# EAGLE board ZephyrEye Rev0.2 (EAGLE 4.15)
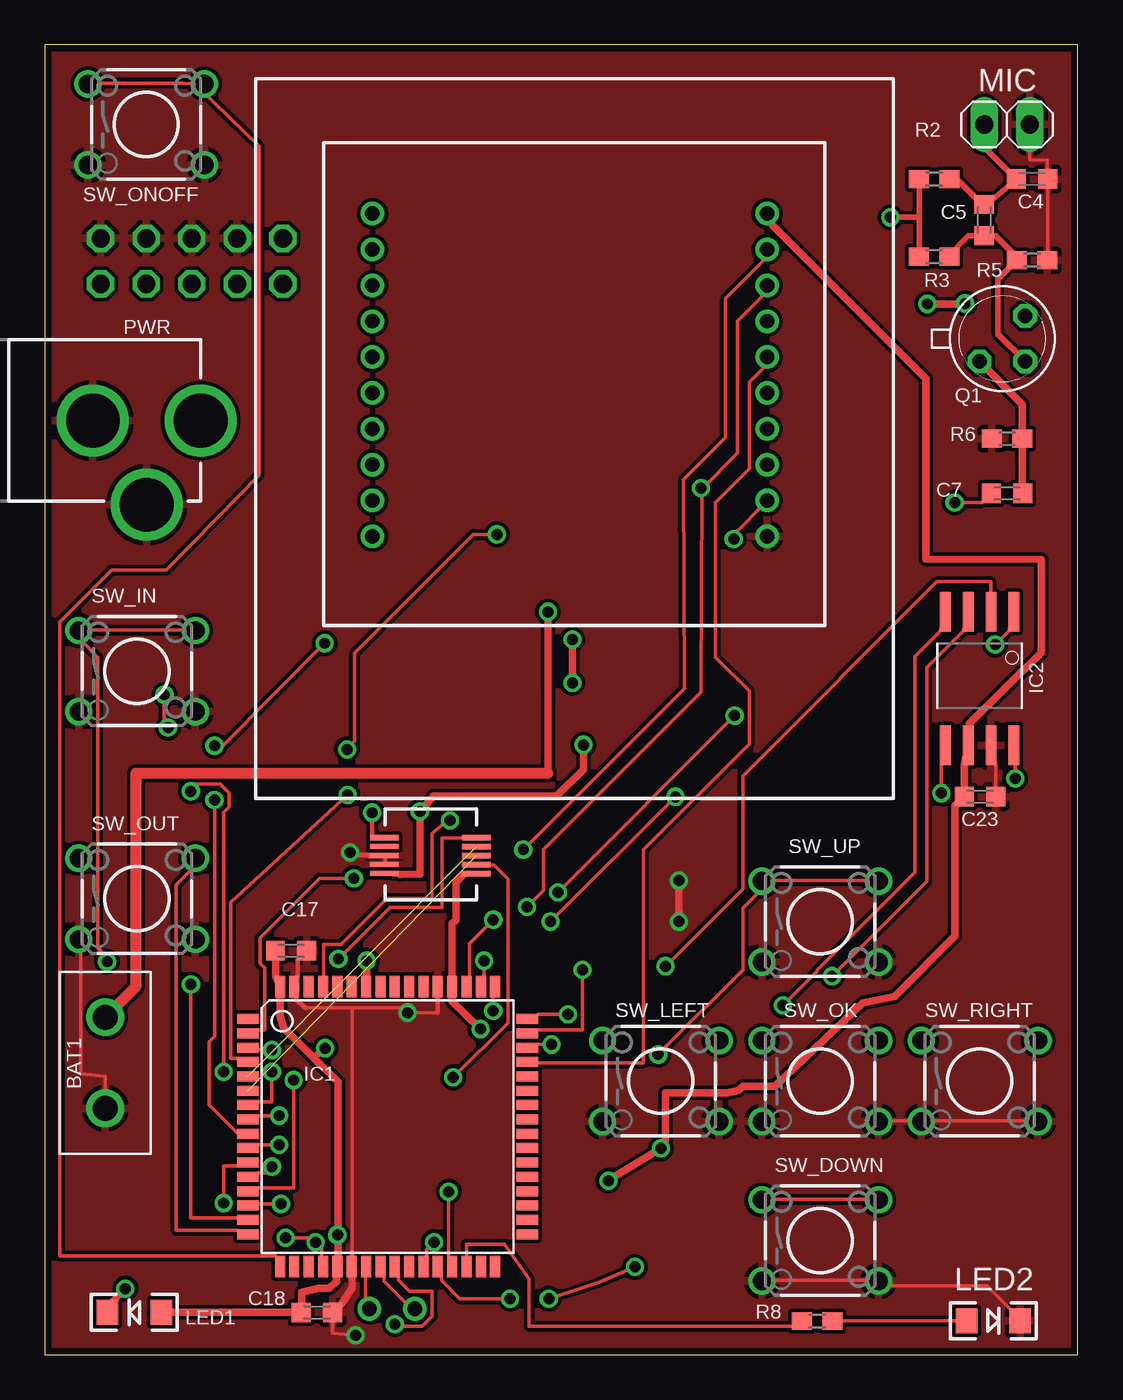
[diagram p0: board, top side]
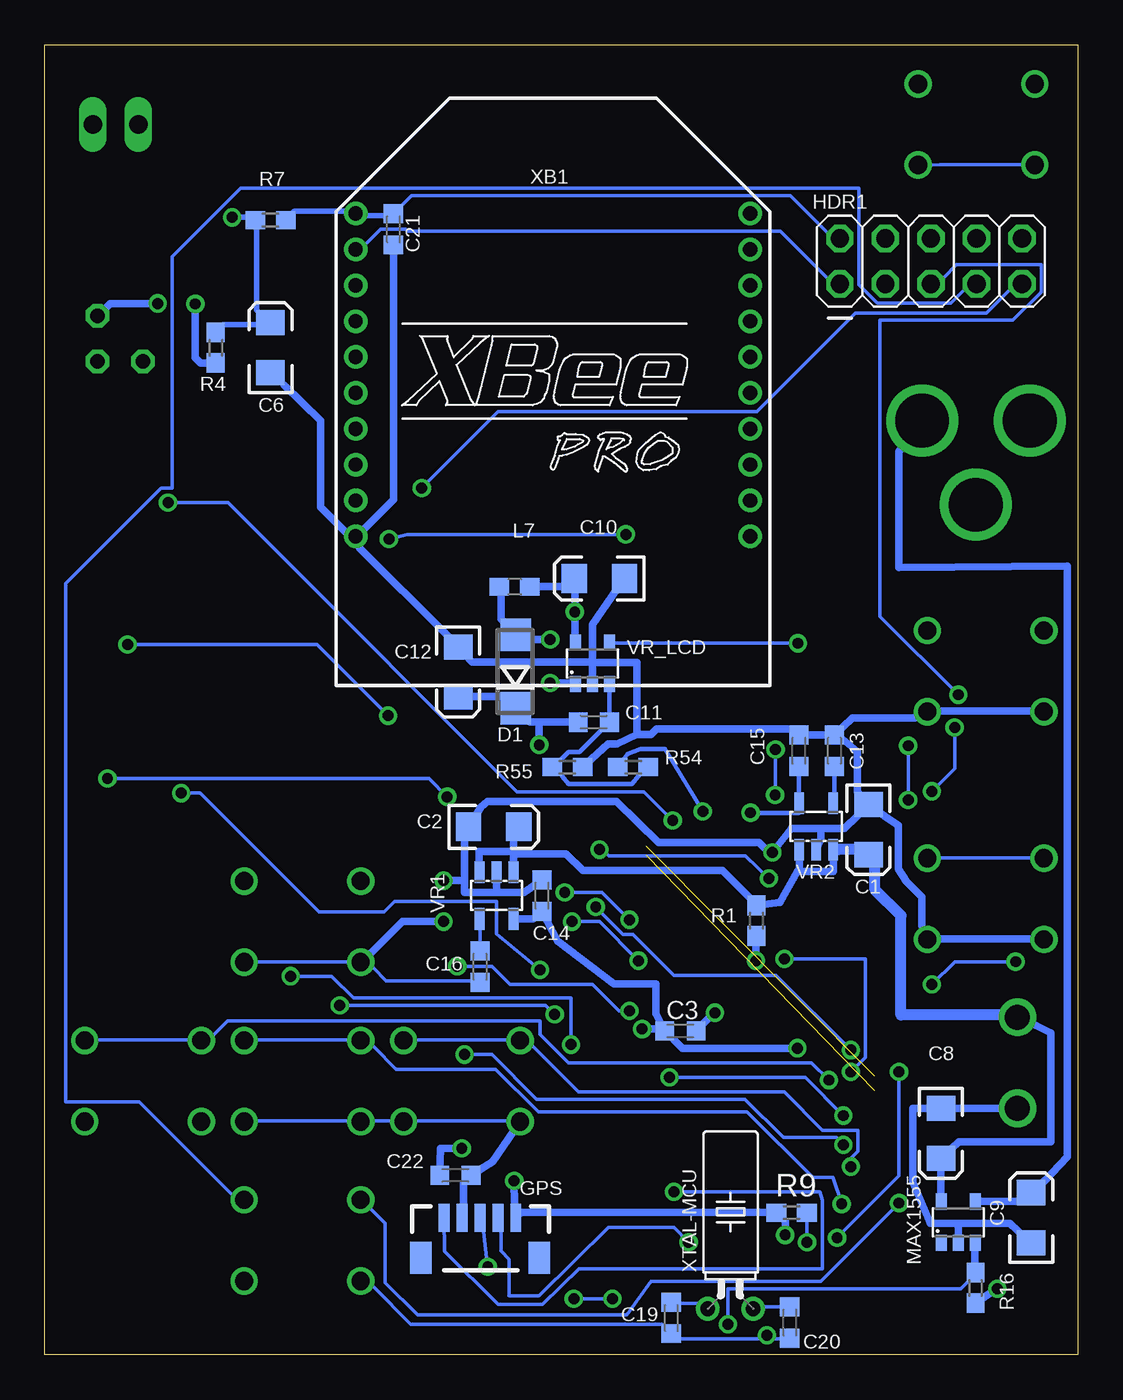
[diagram p1: board, bottom side, seen from below]

Size 57.61 x 73.04 mm. Coordinates in mm from the lower left corner, seen from the top.
Outline: 0,0 57.61,0 57.61,73.04 0,73.04 0,0
Copper layers (1*16): Top 0.035mm / dielectric 1.5mm / Bottom 0.035mm
Design rules "default": minimum track width 8mil, minimum drill 24mil, track to track 8mil, track to pad 8mil, pad to pad 8mil, via to via 8mil, smd to smd 8mil, copper to edge 15mil, drill to drill 8mil, minimum pad ring 10mil, minimum via ring 8mil, stop-mask expansion 4mil, vias tented up to drill 0mil, thermal gap 10mil

## Footprints (pad centres in the part's own frame; a part is rotated, then mirrored left to right if it is on the bottom)
LIPOLY-GEN = drill 1.4 round: V+ -2.54,0; V- 2.54,0
EIA3216 = smd 1.4 x 1.6: A 1.4,0; C -1.4,0
C0603K = smd 1.05 x 1.08: 1 -0.875,0; 2 0.875,0
DO214AC = smd 1.8 x 1.7: A 2.05,0; C -2.05,0
EM408 = smd 0.6 x 1.55: 1 -2,1; 2 -1,1; 3 0,1; 4 1,1; 5 2,1 | smd 1.2 x 1.8: P$1 -3.3,-1.225; P$2 3.3,-1.225
AVR_ICSP = drill 1.016 octagon: 1 -1.27,5.08; 2 1.27,5.08; 3 -1.27,2.54; 4 1.27,2.54; 5 -1.27,0; 6 1.27,0; 7 -1.27,-2.54; 8 1.27,-2.54; 9 -1.27,-5.08; 10 1.27,-5.08
TQFP64 = smd 1.194 x 0.559: 1 -7.8,6; 2 -7.8,5.2; 3 -7.8,4.4; 4 -7.8,3.6; 5 -7.8,2.8; 6 -7.8,2; 7 -7.8,1.2; 8 -7.8,0.4; 9 -7.8,-0.4; 10 -7.8,-1.2; 11 -7.8,-2; 12 -7.8,-2.8; 13 -7.8,-3.6; 14 -7.8,-4.4; 15 -7.8,-5.2; 16 -7.8,-6; 33 7.8,-6; 34 7.8,-5.2; 35 7.8,-4.4; 36 7.8,-3.6; 37 7.8,-2.8; 38 7.8,-2; 39 7.8,-1.2; 40 7.8,-0.4; 41 7.8,0.4; 42 7.8,1.2; 43 7.8,2; 44 7.8,2.8; 45 7.8,3.6; 46 7.8,4.4; 47 7.8,5.2; 48 7.8,6 | smd 0.559 x 1.194: 17 -6,-7.8; 18 -5.2,-7.8; 19 -4.4,-7.8; 20 -3.6,-7.8; 21 -2.8,-7.8; 22 -2,-7.8; 23 -1.2,-7.8; 24 -0.4,-7.8; 25 0.4,-7.8; 26 1.2,-7.8; 27 2,-7.8; 28 2.8,-7.8; 29 3.6,-7.8; 30 4.4,-7.8; 31 5.2,-7.8; 32 6,-7.8; 49 6,7.8; 50 5.2,7.8; 51 4.4,7.8; 52 3.6,7.8; 53 2.8,7.8; 54 2,7.8; 55 1.2,7.8; 56 0.4,7.8; 57 -0.4,7.8; 58 -1.2,7.8; 59 -2,7.8; 60 -2.8,7.8; 61 -3.6,7.8; 62 -4.4,7.8; 63 -5.2,7.8; 64 -6,7.8
SO08WIDE = smd 0.61 x 2.21: 1 -1.905,-3.569; 2 -0.635,-3.569; 3 0.635,-3.569; 4 1.905,-3.569; 5 1.905,3.886; 6 0.635,3.886; 7 -0.635,3.886; 8 -1.905,3.886
0603 = smd 1.1 x 1: 1 -0.85,0; 2 0.85,0
NOKIA6100_LCD = smd 1.6 x 0.3: 1 24.255,44.311; 2 24.255,43.811; 3 24.255,43.311; 4 24.255,42.811; 5 24.255,42.311; 6 29.389,42.303; 7 29.389,42.803; 8 29.389,43.303; 9 29.389,43.803; 10 29.389,44.303
LED-1206 = smd 1.2 x 1.4: A -1.5,0; C 1.5,0
SOT23-5 = smd 0.6 x 0.9: 1 -0.95,-1.15; 2 0,-1.15; 3 0.95,-1.15; 4 0.95,1.15; 5 -0.95,1.15
1X02 = drill 1.016 long: 1 -1.27,0; 2 1.27,0
POWER_JACK_PTH = drill 2.997 round: GND 0,7.7; GNDBREAK 4.7,10.7; PWR 0,13.7
TO18 = drill 0.813 octagon: 1 -1.27,-1.27; 2 1.27,-1.27; 3 1.27,1.27
R0603 = smd 1.1 x 1: 1 -0.85,0; 2 0.85,0
TACTILE-PTH = drill 1.016 round: 1 -3.251,2.261; 2 3.251,2.261; 3 -3.251,-2.261; 4 3.251,-2.261
SOT23-5' = smd 0.55 x 1.2: 1 -0.95,-1.3; 2 0,-1.3; 3 0.95,-1.3; 4 0.95,1.3; 5 -0.95,1.3
XBEE-PRO = drill 0.8 pad 1.27 round: 1 -11,9; 2 -11,7; 3 -11,5; 4 -11,3; 5 -11,1; 6 -11,-1; 7 -11,-3; 8 -11,-5; 9 -11,-7; 10 -11,-9; 11 11,-9; 12 11,-7; 13 11,-5; 14 11,-3; 15 11,-1; 16 11,1; 17 11,3; 18 11,5; 19 11,7; 20 11,9
CRYSTAL = drill 0.813 round: 1 -1.27,0; 2 1.27,0

## Placement (x,y rotation side)
BAT1  [LIPOLY-GEN]  3.37,16.28 270 top
C1  10uF  [EIA3216]  11.67,29.28 270 bottom
C2  10uF  [EIA3216]  32.58,29.43 0 bottom
C3  .1uF  [C0603K]  22.16,18.05 0 bottom
C4  1000pF  [C0603K]  55.05,65.55 0 top
C5  .01uF  [C0603K]  52.39,63.27 90 top
C6  10uF  [EIA3216]  45.02,56.15 90 bottom
C7  .1uF  [C0603K]  53.66,48.03 180 top
C8  1uF  [EIA3216]  7.63,12.34 270 bottom
C9  1uF  [EIA3216]  2.6,7.64 90 bottom
C10  10uF  [EIA3216]  26.68,43.28 180 bottom
C11  100pF  [C0603K]  26.99,35.28 0 bottom
C12  1uF  [EIA3216]  34.56,38.07 270 bottom
C13  470pF  [C0603K]  13.58,33.68 90 bottom
C14  2.2uF (TANT)  [C0603K]  29.88,25.6 90 bottom
C15  2.2uF (TANT)  [C0603K]  15.56,33.68 90 bottom
C16  470pF  [C0603K]  33.34,21.64 270 bottom
C17  .1uF  [C0603K]  13.73,22.52 0 top
C18  .1uF  [C0603K]  15.18,2.36 0 top
C19  18pF  [C0603K]  22.67,2.05 270 bottom
C20  18pF  [C0603K]  16.07,1.8 270 bottom
C21  .1uF  [C0603K]  38.16,62.76 270 bottom
C22  .1uF  [C0603K]  34.71,10 0 bottom
C23  .1uF  [C0603K]  52.16,31.11 0 top
D1  MBRA140  [DO214AC]  31.36,38.09 90 bottom
GPS  EM408  [EM408]  33.34,6.62 0 bottom
HDR1  AVR_SPI_PROG  [AVR_ICSP]  8.19,60.98 90 bottom
IC1  MEGA128-A  [TQFP64]  19.11,12.72 0 top
IC2  DATAFLASH  [SO08WIDE]  52.13,37.87 180 top
L7  10uH  [0603]  31.41,42.82 180 bottom
LCD  NOKIA6100_LCD  [NOKIA6100_LCD]  48.32,71.14 180 top
LED1  [LED-1206]  4.99,2.36 180 top
LED2  [LED-1206]  52.9,1.9 0 top
MAX1555  MAX1555  [SOT23-5]  6.67,7.39 0 bottom
MIC  [1X02]  53.66,68.6 0 top
PWR  [POWER_JACK_PTH]  -5.02,52.09 270 top
Q1  BC108B  [TO18]  53.4,56.66 0 top
R1  1K  [R0603]  17.92,24.2 90 bottom
R2  2.2K  [R0603]  49.59,65.55 180 top
R3  470K  [R0603]  49.59,61.23 180 top
R4  1.5K  [R0603]  48.07,56.15 90 bottom
R5  100K  [R0603]  55.05,61.03 180 top
R6  470  [R0603]  53.66,51.07 0 top
R7  1.5K  [R0603]  45.02,63.27 0 bottom
R8  470  [R0603]  43.07,1.87 0 top
R9  4.7K  [R0603]  15.96,7.92 0 bottom
R16  470  [R0603]  5.7,3.73 270 bottom
R54  100K  [R0603]  24.8,32.76 180 bottom
R55  22K  [R0603]  28.46,32.76 180 bottom
SW_DOWN  [TACTILE-PTH]  43.24,6.37 0 top
SW_IN  [TACTILE-PTH]  5.14,38.12 0 top
SW_LEFT  [TACTILE-PTH]  34.35,15.26 0 top
SW_OK  [TACTILE-PTH]  43.24,15.26 0 top
SW_ONOFF  [TACTILE-PTH]  5.65,68.6 0 top
SW_OUT  [TACTILE-PTH]  5.14,25.42 0 top
SW_RIGHT  [TACTILE-PTH]  52.13,15.26 0 top
SW_UP  [TACTILE-PTH]  43.24,24.15 0 top
VR1  MIC5205  [SOT23-5']  32.42,25.6 180 bottom
VR2  MIC5205  [SOT23-5']  14.59,29.46 0 bottom
VR_LCD  TPS61040  [SOT23-5]  27.06,38.55 0 bottom
XB1  XBEE-PRO  [XBEE-PRO]  29.27,54.63 0 bottom
XTAL-MCU  8MHz  [CRYSTAL]  19.37,2.56 0 bottom

## Library data of the parts
BAT1 MAX1555 VR_LCD XTAL-MCU = brad
C1 C2 C6 C8-C10 C12 HDR1 L7 LCD LED1 LED2 VR1 VR2 = SparkFun-3-2-07
C3-C5 C7 C11 C13-C23 R1-R9 R16 R54 R55 = rcl
D1 = diode
GPS IC2 PWR SW_DOWN SW_IN SW_LEFT SW_OK SW_ONOFF SW_OUT SW_RIGHT SW_UP = SparkFunEagle-6-6-07
IC1 = atmel
MIC = pinhead
Q1 = transistor-npn
XB1 = maxstream

## Nets
+6.8V: C11.1 C12.A D1.C LCD.10 R54.2
AUDIO_IN: C7.2 IC1.61
CHG: IC1.25 MAX1555.3 R16.1
CS: IC1.48 IC2.4
FRAM_RST: IC1.46 IC2.3
FRAM_WP: IC1.47 IC2.5
GND: BAT1.V- C1.C C2.C C3.2 C4.2 C6.C C8.C C9.C C10.C C12.C C13.2 C14.2 C15.2 C16.2 C17.2 C18.2 C19.2 C20.2 C21.2 C22.2 C23.2 GPS.2 HDR1.4 HDR1.6 HDR1.8 HDR1.10 IC1.22 IC1.53 IC1.63 IC2.7 LCD.8 LCD.9 LED2.C MAX1555.2 MIC.2 PWR.GND PWR.GNDBREAK R5.1 R6.1 R55.1 SW_DOWN.3 SW_DOWN.4 SW_IN.3 SW_IN.4 SW_LEFT.3 SW_LEFT.4 SW_OK.3 SW_OK.4 SW_ONOFF.3 SW_ONOFF.4 SW_OUT.3 SW_OUT.4 SW_RIGHT.3 SW_RIGHT.4 SW_UP.3 SW_UP.4 VR1.2 VR2.2 VR_LCD.2 XB1.10
GPS_EN: GPS.1 IC1.29
GPS_RX: GPS.3 IC1.28
GPS_TX: GPS.4 IC1.27
LCD_CS: IC1.7 LCD.5
LCD_DIO: IC1.6 LCD.3
LCD_RST: IC1.8 LCD.2
LCD_SCK: IC1.5 LCD.4
LCD_VEN: IC1.9 VR_LCD.4
LED: IC1.30 R8.1
MIC1: C4.1 C5.2 MIC.1 R2.1
MIC-Q1: C5.1 Q1.2 R3.1 R5.2
MIC_RAIL+: C6.A R2.2 R3.2 R4.2 R7.1
MISO: IC1.50 IC2.8
MOSI: IC1.51 IC2.1
N$2: LED1.C R16.2
Q1_+: Q1.3 R4.1
Q1_OUT: C7.1 Q1.1 R6.2
R8-LED2: LED2.A R8.2
RESET: HDR1.5 IC1.20 R9.2
SCK: IC1.49 IC2.2
SW_DOWN: HDR1.7 IC1.11 SW_DOWN.1 SW_DOWN.2
SW_IN: IC1.15 SW_IN.1 SW_IN.2
SW_LEFT: IC1.12 SW_LEFT.1 SW_LEFT.2
SW_OK: IC1.14 SW_OK.1 SW_OK.2
SW_ONOFF: IC1.17 SW_ONOFF.1 SW_ONOFF.2
SW_OUT: IC1.16 SW_OUT.1 SW_OUT.2
SW_RIGHT: IC1.13 SW_RIGHT.1 SW_RIGHT.2
SW_UP: IC1.10 SW_UP.1 SW_UP.2
VBAT: BAT1.V+ C1.A C2.A C8.A C10.A L7.1 MAX1555.5 R1.2 VR1.1 VR1.3 VR2.1 VR2.3 VR_LCD.5
VCC: C3.1 C14.1 C17.1 C18.1 C21.1 C22.1 C23.1 GPS.5 HDR1.2 IC1.21 IC1.52 IC1.64 IC2.6 LCD.1 LED1.A R7.2 R9.1 VR1.5 XB1.1
VCHARGE: C9.A MAX1555.4 PWR.PWR
VDSP: C15.1 LCD.6 VR2.5
VR1_BP: C16.1 VR1.4
VR2_BP: C13.1 VR2.4
VR_LCD_FB: C11.2 R54.1 R55.2 VR_LCD.3
VR_LCD_SW: D1.A L7.2 VR_LCD.1
VSNS: IC1.58 R1.1
XTAL1: C19.1 IC1.24 XTAL-MCU.1
XTAL2: C20.1 IC1.23 XTAL-MCU.2
ZIG_RST: IC1.45 XB1.5
ZIG_RX: HDR1.9 IC1.3 XB1.3
ZIG_SLP: IC1.4 XB1.9
ZIG_TX: HDR1.1 IC1.2 XB1.2

## Tracks (layer width: path | path; a pad name or v marks a point on that pad's centre or on a via)
+6.8V  (via drill 0.61)
  Top 0.305: LCD.10 19.8,26.79
  Top 0.406: 19.8,26.79 20.92,26.82 v20.92,30.3 21.68,31.16 28.54,31.16 30.04,32.63 v30.04,34.01
  Bottom 0.254: v20.92,30.3 23.03,33.78 24.4,33.78 25.11,33.5 R54.2
  Bottom 0.406: 30.04,35.28 30.54,35.28 D1.C 32.17,36.7 33.79,36.7 C12.A | 30.04,35.28 C11.1 | v30.04,34.01 30.04,35.28
AUDIO_IN  (via drill 0.61)
  Top 0.203: v50.74,47.52 52.29,47.52 C7.2 | v22.59,29.79 22.47,29.79 21.6,29.05 21.6,25.45 19.09,25.45 16.52,22.88 15.56,22.88 15.56,21.1 IC1.61
  Bottom 0.203: v50.74,47.52 47.38,47.52 45.43,45.56 31.28,31.36 24.19,31.36 v22.59,29.79
CHG  (via drill 0.61)
  Top 0.203: v19.52,1.7 19.52,1.6 21.04,1.6 21.6,2.15 21.6,3.53 20.33,3.53 19.72,4.14 19.72,4.34 IC1.25
  Bottom 0.203: 5.75,5.81 MAX1555.3 | 5.75,5.1 R16.1 6.16,4.03 6.52,3.68 19.52,3.68 v19.52,1.7
  Bottom 0.406: 5.75,5.1 5.75,5.81
CS  (via drill 0.61)
  Top 0.203: v29.17,18.97 27.5,18.97 IC1.48 | v41.16,19.48 43.09,21.41 43.09,21.46 48.53,26.89 48.53,38.93 49.95,40.36 IC2.4
  Bottom 0.203: v29.17,18.97 29.68,19.48 v41.16,19.48
FRAM_RST  (via drill 0.61)
  Top 0.203: v28.26,17.29 27.5,17.29 IC1.46 | v43.9,21.1 49.19,26.39 49.19,38.32 51.22,40.36 IC2.3
  Bottom 0.203: v28.26,17.29 28.26,19.88 40.4,19.88 41.62,21.1 v43.9,21.1
FRAM_WP  (via drill 0.61)
  Top 0.203: v29.98,21.46 29.98,18.11 27.5,18.11 IC1.47 | v50,31.31 50,32.89 IC2.5
  Bottom 0.203: v29.98,21.46 32.42,23.46 32.42,25.27 38.11,25.27 38.7,24.68 42.3,24.68 48.93,31.31 v50,31.31
GND  (via drill 0.61)
  Top 0.203: C23.2 53.05,31.62 53.05,32.89 IC2.7 | LED2.C 53.81,2.56 52.54,3.83 47.21,3.83 SW_DOWN.4 45.78,4.14 40.7,4.14 SW_DOWN.3 | SW_OK.4 47.21,13.03 48.17,13.03 SW_RIGHT.3 49.59,13.03 54.67,13.03 SW_RIGHT.4 | MIC.2 54.93,66.64 55.89,66.59 C4.2 55.94,65.04 55.94,61.49 R5.1 | 21.91,19.07 v20.23,19.07 19.77,19.32 17.13,19.32 | 17.13,19.32 14.54,19.32 | IC1.22 17.13,5.51 17.13,19.32 | v17.34,1.09 16.04,1.19 C18.2 | LCD.9 18.96,27.45 18.96,27.71 LCD.8 18.07,27.83 | v17.03,28.01 17.03,27.86 | BAT1.V- 3.37,15.51 1.99,15.67 1.99,22.42 SW_OUT.3
  Top 0.254: C17.2 14.08,22.02 14.08,21.1 IC1.63 14.01,19.93 14.01,19.78 14.54,19.32 | 21.91,19.07 21.91,19.93 IC1.53
  Top 0.305: 17.03,27.86 18.07,27.83
  Top 0.406: C18.2 16.57,2.87 17.13,3.73 17.13,4.85 IC1.22 | v35.37,26.44 v35.37,24.15
  Bottom 0.203: C16.2 33.85,20.85 38.57,20.85 39.28,21.56 SW_UP.3 40.7,21.92 45.78,21.92 SW_UP.4 | SW_LEFT.3 31.81,13.03 36.89,13.03 SW_LEFT.4 38.32,13.03 39.28,13.03 SW_OK.3 40.7,13.03 45.78,13.03 SW_OK.4 | SW_ONOFF.3 2.6,66.37 7.68,66.37 SW_ONOFF.4 | 17.34,0.88 22.16,0.88 C19.2 23.18,1.7 37.2,1.7 39.28,3.78 SW_DOWN.3 | 17.34,0.88 16.57,0.88 C20.2 | v20.23,19.07 20.28,19.07 | 17.34,0.88 v17.34,1.09 | SW_IN.4 7.68,35.89 | SW_OUT.3 2.6,23.19 | 32.4,25.78 32.42,26 32.42,25.98 | C2.C 34.2,29.03 | C13.2 14.08,34.56 | 44.26,54.07 C6.C
  Bottom 0.406: SW_LEFT.3 31.46,12.47 32.63,10.74 C22.2 33.82,10 33.85,9.77 34.25,9.6 34.25,8.43 GPS.2 | 27.06,38.63 27.06,40.71 25.69,42.69 C10.C | 27.06,38.6 27.06,38.63 | 27.06,38.6 VR_LCD.2 | 24.57,34.59 25.69,34.06 26.2,34.06 27.09,33.24 R55.1 | 24.57,34.59 24.57,38.6 27.06,38.6 | 27.06,38.63 33.79,38.63 C12.C 35.22,40.15 40.04,44.98 XB1.10 | 20.28,19.07 20.79,18.56 C3.2 | 6.67,7.34 3.8,7.34 3.37,6.93 C9.C | 6.67,7.34 MAX1555.2 | BAT1.V- 6.87,13.74 C8.C 8.39,13.74 9.21,13.74 9.21,9.62 8.22,7.34 6.67,7.34 | 7.68,35.89 2.6,35.89 SW_IN.3 | 2.6,23.19 7.68,23.19 SW_OUT.4 8.7,23.9 8.7,25.52 9.56,26.39 9.99,27.1 9.99,29.51 10.78,30.04 C1.C | 32.4,25.78 30.87,25.78 C14.2 | 32.42,26 VR1.2 | 34.2,29.03 34.2,25.78 | 34.2,25.78 32.4,25.78 | 32.4,25.78 32.42,25.98 | 14.08,34.56 15.05,34.56 C15.2 16.07,34.89 23.51,34.89 23.81,34.59 24.57,34.59 | 14.34,29.33 14.34,28.72 VR2.2 | 14.34,29.33 13.02,29.33 12.31,30.04 C1.C | C1.C 12.31,31.36 12.31,33.62 13.3,34.46 C13.2 12.59,35.5 9.08,35.5 9.11,35.53 SW_IN.4 | 14.34,29.33 15.96,29.33 v17.03,28.01 17.49,28.27 17.79,28.57 23.38,28.57 25.72,30.86 32.93,30.86 33.29,30.55 C2.C | 44.26,54.07 42.23,52.09 42.23,47.26 40.55,45.59 XB1.10 | 40.27,45.56 40.3,45.54 | XB1.10 40.27,45.56 | C21.2 38.16,47.67 40.27,45.56 | 34.2,25.78 34.2,26.44 v35.37,26.44 | SW_UP.3 39.97,21.89 39.94,21.86 37.66,24.15 v35.37,24.15
  Bottom 0.61: SW_IN.4 8.27,35.86
  pour Top: 0.32,0.27 57.21,0.27 57.21,72.66 0.32,72.66
GPS_EN  (via drill 0.61)
  Top 0.203: v22.52,9.09 22.52,5.51 IC1.29
  Bottom 0.203: v22.52,9.09 14.39,9.09 14.24,8.61 14.24,4.8 27.83,4.8 29.86,2.81 32.35,2.81 35.32,5.76 GPS.1
GPS_RX  (via drill 0.61)
  Top 0.203: v25.95,3.12 23.13,3.12 22.11,4.14 22.09,4.54 IC1.28 | v28.11,3.12 30.9,4.03 v32.91,4.9
  Bottom 0.203: v25.95,3.12 v28.11,3.12 | v32.91,4.9 33.13,6.88 GPS.3
GPS_TX  (via drill 0.61)
  Top 0.203: v21.7,6.27 21.3,5.86 21.3,5.51 IC1.27
  Bottom 0.203: v21.7,6.27 22.52,7.11 26.17,7.11 30.04,3.27 31.71,3.27 31.71,5.33 32.17,5.79 32.17,6.88 GPS.4
LCD_CS  (via drill 0.61)
  Top 0.203: v12.66,15.77 12.66,14.09 11.9,14.09 IC1.7 | v16.37,22.07 19.24,24.94 22.16,24.94 22.16,28.82 23.28,28.82 LCD.5
  Bottom 0.203: v12.66,15.77 11.85,16.58 11.85,22.07 v16.37,22.07
LCD_DIO  (1 unrouted)
LCD_RST  (via drill 0.61)
  Top 0.203: v13.07,13.33 11.9,13.33 IC1.8 | v22.77,15.46 25.82,18.51 25.82,26.54 25.06,27.3 24.85,27.3 LCD.2
  Bottom 0.203: v13.07,13.33 15.2,15.46 v22.77,15.46
LCD_SCK  (1 unrouted)
LCD_VEN  (via drill 0.61)
  Top 0.203: v15.61,39.67 9.92,33.95 v9.46,33.95 | v9.46,30.93 9.46,17.75 9.16,17.44 9.16,13.94 10.73,12.36 IC1.9
  Bottom 0.203: v15.61,39.67 26.1,39.67 VR_LCD.4 | v9.46,30.93 v9.46,33.95
LED
  Top 0.203: R8.1 41.67,1.6 27.01,1.6 27.01,4.24 25.64,6.17 23.51,6.17 23.51,5.71 IC1.30
MIC1
  Top 0.305: MIC.1 52.39,67.33 54.17,65.55 | 52.39,64.03 52.53,64.14 C5.2 52.39,64.03 | 54.17,65.55 C4.1 | 52.39,64.03 54.17,65.55 | R2.1 50.86,65.55 52.39,64.03
MIC-Q1
  Top 0.305: R3.1 50.36,61.23 51.51,62.39 C5.1 53.01,62.39 54.2,61.2 R5.2 53.15,59.98 53.15,56.92 Q1.2
MIC_RAIL+  (via drill 0.61)
  Top 0.305: 48.78,63.42 48.78,65.1 R2.2 | 48.78,63.42 48.78,61.69 R3.2 | v47.16,63.42 48.78,63.42
  Bottom 0.203: 45.78,62.81 R7.1 46.39,63.42
  Bottom 0.305: R4.2 47.65,57.42 45.02,57.42 C6.A 45.78,58.24 45.78,62.81 | 46.39,63.42 v47.16,63.42
MISO  (via drill 0.61)
  Top 0.203: v24.5,21.97 24.5,21.1 IC1.50 | v28.21,24.15 v35.17,31.11 | v54.11,32.13 54.11,32.89 IC2.8
  Bottom 0.203: v24.5,21.97 26.68,24.15 v28.21,24.15 | v35.17,31.11 36.18,32.13 v54.11,32.13
MOSI  (via drill 0.61)
  Top 0.203: v25.01,24.25 23.69,22.93 23.69,21.1 IC1.51 | v28.61,25.78 v38.47,35.63 | v53,39.59 53.76,40.36 IC2.1
  Bottom 0.203: v25.01,24.25 26.53,25.78 v28.61,25.78 | v38.47,35.63 42.43,39.59 v53,39.59
N$2  (via drill 0.61)
  Top 0.406: v4.48,3.68 4.08,3.27 3.77,2.94 LED1.C
  Bottom 0.406: v4.48,3.68 4.66,3.63 4.66,3.6 R16.2
Q1_+  (via drill 0.61)
  Top 0.406: v49.21,58.59 51.3,58.59 v51.32,58.62
  Bottom 0.406: R4.1 48.92,55.3 49.21,55.6 v49.21,58.59 | Q1.3 54.65,57.93 53.96,58.62 v51.32,58.62
Q1_OUT
  Top 0.203: C7.1 54.52,48.53 | 54.52,50.62 R6.2
  Top 0.406: 54.52,48.53 54.52,50.62 | Q1.1 52.13,55.37 54.52,52.98 54.52,51.25 54.42,51.15 R6.2
R8-LED2
  Top 0.203: R8.2 44.46,1.9 LED2.A
RESET  (via drill 0.61)
  Top 0.203: IC1.20 15.43,5.51 15.43,6.07 v15.1,6.27 14.64,6.52 v13.42,6.52 | v9.97,15.77 9.97,30.25 10.27,30.55 10.27,31.31 9.77,31.82 8.14,31.82 v8.14,31.41 | v6.87,34.97 6.67,35.17 v6.67,36.8
  Bottom 0.203: v15.1,6.27 15.1,7.44 R9.2 | v13.42,6.52 9.97,9.98 v9.97,15.77 | v8.14,31.41 6.87,32.68 v6.87,34.97 | v6.67,36.8 11.04,41.17 11.04,57.68 3.62,57.68 2.04,59.25 2.04,60.78 6.77,60.78 7.48,60.07 HDR1.5
SCK  (via drill 0.61)
  Top 0.203: v25.01,19.17 25.01,19.93 IC1.49 | v34.61,21.66 38.93,25.98 38.93,32.28 49.75,43.1 52.74,43.1 52.74,42.74 IC2.2
  Bottom 0.203: v25.01,19.17 25.59,19.17 27.06,20.65 31.66,20.65 32.68,21.66 v34.61,21.66
SW_DOWN  (via drill 0.61)
  Top 0.203: v9.97,8.45 9.97,10.54 10.73,10.54 IC1.11 | SW_DOWN.2 45.78,8.66 40.7,8.66 SW_DOWN.1
  Bottom 0.203: v9.97,8.45 14.34,4.08 23.81,4.08 25.13,2.23 36.82,2.23 38.62,4.01 38.62,7.34 39.97,8.66 39.92,8.63 SW_DOWN.1 | HDR1.7 6.36,59.35 7.07,58.64 11.19,58.64 12.2,59.66 12.2,65.04 46.7,65.04 50.51,61.23 50.51,48.33 51.12,48.33 56.45,43 56.45,14.09 52.34,14.09 47.21,8.96 SW_DOWN.2
SW_IN  (via drill 0.61)
  Top 0.203: v8.14,20.65 8.14,7.64 10.73,7.64 IC1.15 | v3.47,21.92 2.96,22.73 2.96,38.88 2.2,39.64 SW_IN.1 2.6,40.41 7.68,40.41 SW_IN.2
  Bottom 0.203: v8.14,20.65 6.85,21.92 v3.47,21.92
SW_LEFT  (via drill 0.61)
  Top 0.203: v12.66,10.49 12.66,10.13 11.9,10.13 IC1.12
  Bottom 0.203: v12.66,10.49 12.66,10.94 12.26,11.35 12.26,12.52 14.24,12.52 16.37,14.65 27.85,14.65 30.39,17.19 SW_LEFT.1 31.81,17.55 36.89,17.55 SW_LEFT.2
SW_OK  (via drill 0.61)
  Top 0.203: v13.17,8.4 11.9,8.4 IC1.14
  Bottom 0.203: v13.17,8.4 13.65,9.88 14.77,9.88 18.45,13.53 30.09,13.53 32.47,15.92 38.01,15.92 39.28,17.19 SW_OK.1 40.7,17.55 45.78,17.55 SW_OK.2
SW_ONOFF
  Top 0.203: IC1.17 12.87,5.51 0.83,5.51 0.83,40.86 3.72,43.76 6.77,43.76 9.56,46.6 11.95,49.04 11.95,67.38 8.6,70.63 SW_ONOFF.2 7.68,70.89 2.6,70.89 SW_ONOFF.1
SW_OUT
  Top 0.203: IC1.16 10.73,6.93 7.33,6.93 7.33,26.18 8.09,26.94 SW_OUT.2
  Bottom 0.203: SW_OUT.1 2.6,27.71 7.68,27.71 SW_OUT.2
SW_RIGHT  (via drill 0.61)
  Top 0.203: v13.88,15.31 13.88,9.32 11.9,9.32 IC1.13
  Bottom 0.203: v13.88,15.31 14.85,16.28 28.41,16.28 29.98,17.85 29.98,18.61 47.41,18.61 48.17,17.85 SW_RIGHT.1 49.59,17.55 54.67,17.55 SW_RIGHT.2
SW_UP  (via drill 0.61)
  Top 0.203: v13.07,11.7 11.9,11.7 IC1.10 | v34.2,16.73 38.93,21.46 38.93,24.91 39.69,25.67 SW_UP.1 40.7,26.44 45.78,26.44 SW_UP.2
  Bottom 0.203: v13.07,11.7 13.47,12.11 16.42,12.11 18.55,14.24 30.19,14.24 32.68,16.73 v34.2,16.73
VBAT  (via drill 0.61)
  Top 0.406: 28.05,32.43 v28.05,41.42
  Top 0.61: BAT1.V+ 5.09,20.54 5.09,32.43 28.05,32.43
  Bottom 0.203: 31.46,29.03 C2.A | 13.37,28.16 VR2.3 | C1.A 12.31,28.16 | 28.05,40.1 VR_LCD.5 | 28.05,42.59 C10.A 28.71,42.84 | 30.04,42.84 L7.1 | 7.63,8.96 MAX1555.5
  Bottom 0.406: 31.46,28.06 31.46,29.03 | 31.46,27.94 31.46,27.45 VR1.1 | 31.46,27.94 31.46,28.06 | VR1.3 33.39,27.45 33.39,28.06 31.46,28.06 | 15.53,26.94 VR2.1 | 15.53,26.94 13.63,26.94 13.63,27.3 VR2.3 | 15.53,26.94 15.63,26.94 16.62,25.22 R1.2 18.4,25.57 19.82,27 27.6,27 28.54,27.94 31.46,27.94 | 28.05,42.59 v28.05,41.42 28.05,40.1 | 28.71,42.84 30.04,42.84 | 7.63,8.96 C8.A 7.02,11.5 6.64,11.86 1.51,11.86 1.51,17.95 2.35,18.36 BAT1.V+
  Bottom 0.61: 12.31,28.16 13.37,28.16 | C1.A 11.32,27.53 11.32,25.93 9.87,24.48 9.87,18.94 3.59,18.94 BAT1.V+
VCC  (via drill 0.61)
  Top 0.203: 23.36,26.77 LCD.1 | C23.1 51.27,31.62 | v31.43,9.7 31.46,9.75 | 16.34,6.42 v16.32,6.68
  Top 0.406: 23.36,26.77 22.92,26.33 22.92,24.25 22.72,24.05 22.72,23.57 IC1.52 22.72,20.11 22.72,19.71 v24.3,18.16 | C17.1 12.87,22.02 12.87,21.1 IC1.64 13.12,18.89 13.32,18.23 15,16.56 | LED1.A C18.1 14.31,3.47 15.23,3.7 15.86,3.7 16.27,4.08 IC1.21 16.34,5.2 16.34,6.42 16.34,15.21 15,16.56 | 15,16.56 v15.63,17.09 | 51.27,31.62 51.27,32.89 IC2.6 51.55,35.2 55.56,39.16 55.56,44.34 49.14,44.37 49.14,54.43 40.55,63.01 XB1.1 | 31.46,9.75 v34.35,11.5 34.61,11.96 34.61,14.6 38.06,14.6 38.67,14.75 38.93,14.96 40.7,14.96 45.63,19.63 47.41,19.98 50.74,23.36 50.74,30.63 50.76,30.6 C23.1
  Bottom 0.203: 31.2,24.3 VR1.5 | 22.52,17.55 C3.1 | HDR1.2 13.98,62.61 16.01,64.64 37.15,64.64 37.66,64.13 C21.1
  Bottom 0.305: R7.2 43.66,63.77 40.2,63.77 40.2,63.71 XB1.1 40.16,63.52 38.16,63.52 C21.1
  Bottom 0.406: 31.2,24.3 30.39,24.3 C14.1 29.02,23.08 25.87,20.67 23.53,20.67 23.53,18.99 C3.1 23.53,18.16 v24.3,18.16 | 22.52,17.55 22.06,17.09 v15.63,17.09 | v34.35,11.5 35.55,11.5 C22.1 | v31.43,9.7 31.41,8.35 GPS.5 31.05,7.95 17.34,7.95 R9.1 16.32,7.44 v16.32,6.68
VCHARGE
  Bottom 0.406: MAX1555.4 5.45,8.55 3.37,8.55 C9.A 1.84,9.72 1.87,9.67 0.6,11.02 0.6,43.96 9.97,43.89 9.97,50.36 PWR.PWR
VDSP  (via drill 0.61)
  Top 0.203: 18.25,28.85 LCD.6
  Top 0.254: v18.25,30.22 18.25,28.85
  Bottom 0.203: VR2.5 15.56,31.31
  Bottom 0.254: 15.56,31.31 C15.1 | v18.25,30.22 15.56,30.22 VR2.5
VR1_BP
  Bottom 0.203: C16.1 33.34,23.74 VR1.4
VR2_BP
  Bottom 0.203: 13.58,31.31 VR2.4
  Bottom 0.254: C13.1 13.58,31.31
VR_LCD_FB
  Bottom 0.203: 26.12,37 VR_LCD.3 | 28.77,32.28 R55.2
  Bottom 0.254: 26.12,37 26.12,35.78 C11.2 26.63,34.77 27.8,33.6 28.41,33.6 28.77,33.24 R55.2 | 28.77,32.28 28.41,31.82 24.85,31.82 24.5,32.28 R54.1
VR_LCD_SW  (via drill 0.61)
  Top 0.406: v29.43,37.46 v29.43,39.87
  Bottom 0.254: VR_LCD.1 28.11,37.46 | 30.77,39.87 D1.A | 32.17,42.34 L7.2
  Bottom 0.406: 28.11,37.46 v29.43,37.46 | v29.43,39.87 30.77,39.87 | 32.17,42.34 32.17,41.02 D1.A
VSNS  (via drill 0.61)
  Top 0.203: IC1.58 17.95,21.1
  Top 0.406: 17.95,21.1 v17.95,21.97
  Bottom 0.203: 17.95,22.83 R1.1
  Bottom 0.406: v17.95,21.97 17.95,22.83
XTAL1
  Top 0.203: IC1.24 18.91,4.34 18.91,4.08 20.08,2.92 XTAL-MCU.1
  Bottom 0.203: C19.1 22.16,2.87 21.25,2.87 XTAL-MCU.1
XTAL2
  Top 0.203: IC1.23 17.89,4.34 17.89,3.17 XTAL-MCU.2
  Bottom 0.203: C20.1 16.57,2.66 17.49,2.66 XTAL-MCU.2
ZIG_RST
  Top 0.203: IC1.45 27.5,16.28 33.39,16.28 33.39,28.16 39.28,34.06 39.28,37 37.4,38.88 37.4,47.52 39.28,49.4 39.28,54.22 40.04,54.99 XB1.5
ZIG_RX  (via drill 0.61)
  Top 0.203: v12.66,16.99 11.9,16.99 IC1.3 | v26.89,24.96 27.8,25.88 27.8,28.16 36.59,36.95 36.64,48.28 | 36.64,48.28 38.62,50.26 38.62,57.63 39.99,59 XB1.3 | 36.64,48.28 v36.59,48.33
  Bottom 0.203: v12.66,16.99 16.83,21.15 22.52,21.15 24.8,23.44 25.36,23.44 v26.89,24.96 | v36.59,48.33 32.32,52.6 17.89,52.6 12.41,58.08 5.09,58.08 3.82,59.35 HDR1.9
ZIG_SLP  (via drill 0.61)
  Top 0.203: v16.88,31.21 10.38,25.22 10.38,16.53 10.73,16.53 IC1.4 | v16.85,33.75 17.28,34.21 17.28,39.14 23.89,45.74 v25.21,45.74 | XB1.9 40.27,47.6 38.42,45.74 v38.42,45.49
  Bottom 0.203: v16.88,31.21 16.88,33.75 v16.85,33.75 | v25.21,45.74 37.4,45.74 v38.42,45.49
ZIG_TX  (via drill 0.61)
  Top 0.203: v17.23,26.56 15.33,26.56 12,23.24 12,21.81 12.26,21.56 12.26,18.11 11.9,18.11 IC1.2 | v26.68,28.16 35.67,37.16 35.62,48.79 37.96,51.13 37.96,58.9 40.04,60.98 XB1.2
  Bottom 0.203: v17.23,26.56 18.53,27.81 26.15,27.81 26.5,28.16 v26.68,28.16 | HDR1.1 13.98,60.07 16.57,62.66 37.4,62.66 37.5,62.76 38.87,62.76 39.69,61.95 XB1.2

## Text on the board
Reference: Box: Hammond 1591A | PCB Mounts: 1591Z6 | Battery: LiPoly 860mAh